# Altium PCB PCB1.PcbDoc
Units mm, origin at the board's own origin, x right, y up, seen from the top; angles counter-clockwise.
Board outline 143.82 x 127.37 mm, 2 copper layers (Top Layer, Bottom Layer), stack 1.671 mm thick; 59 components, 8 nets, 134 pads, 55 vias.
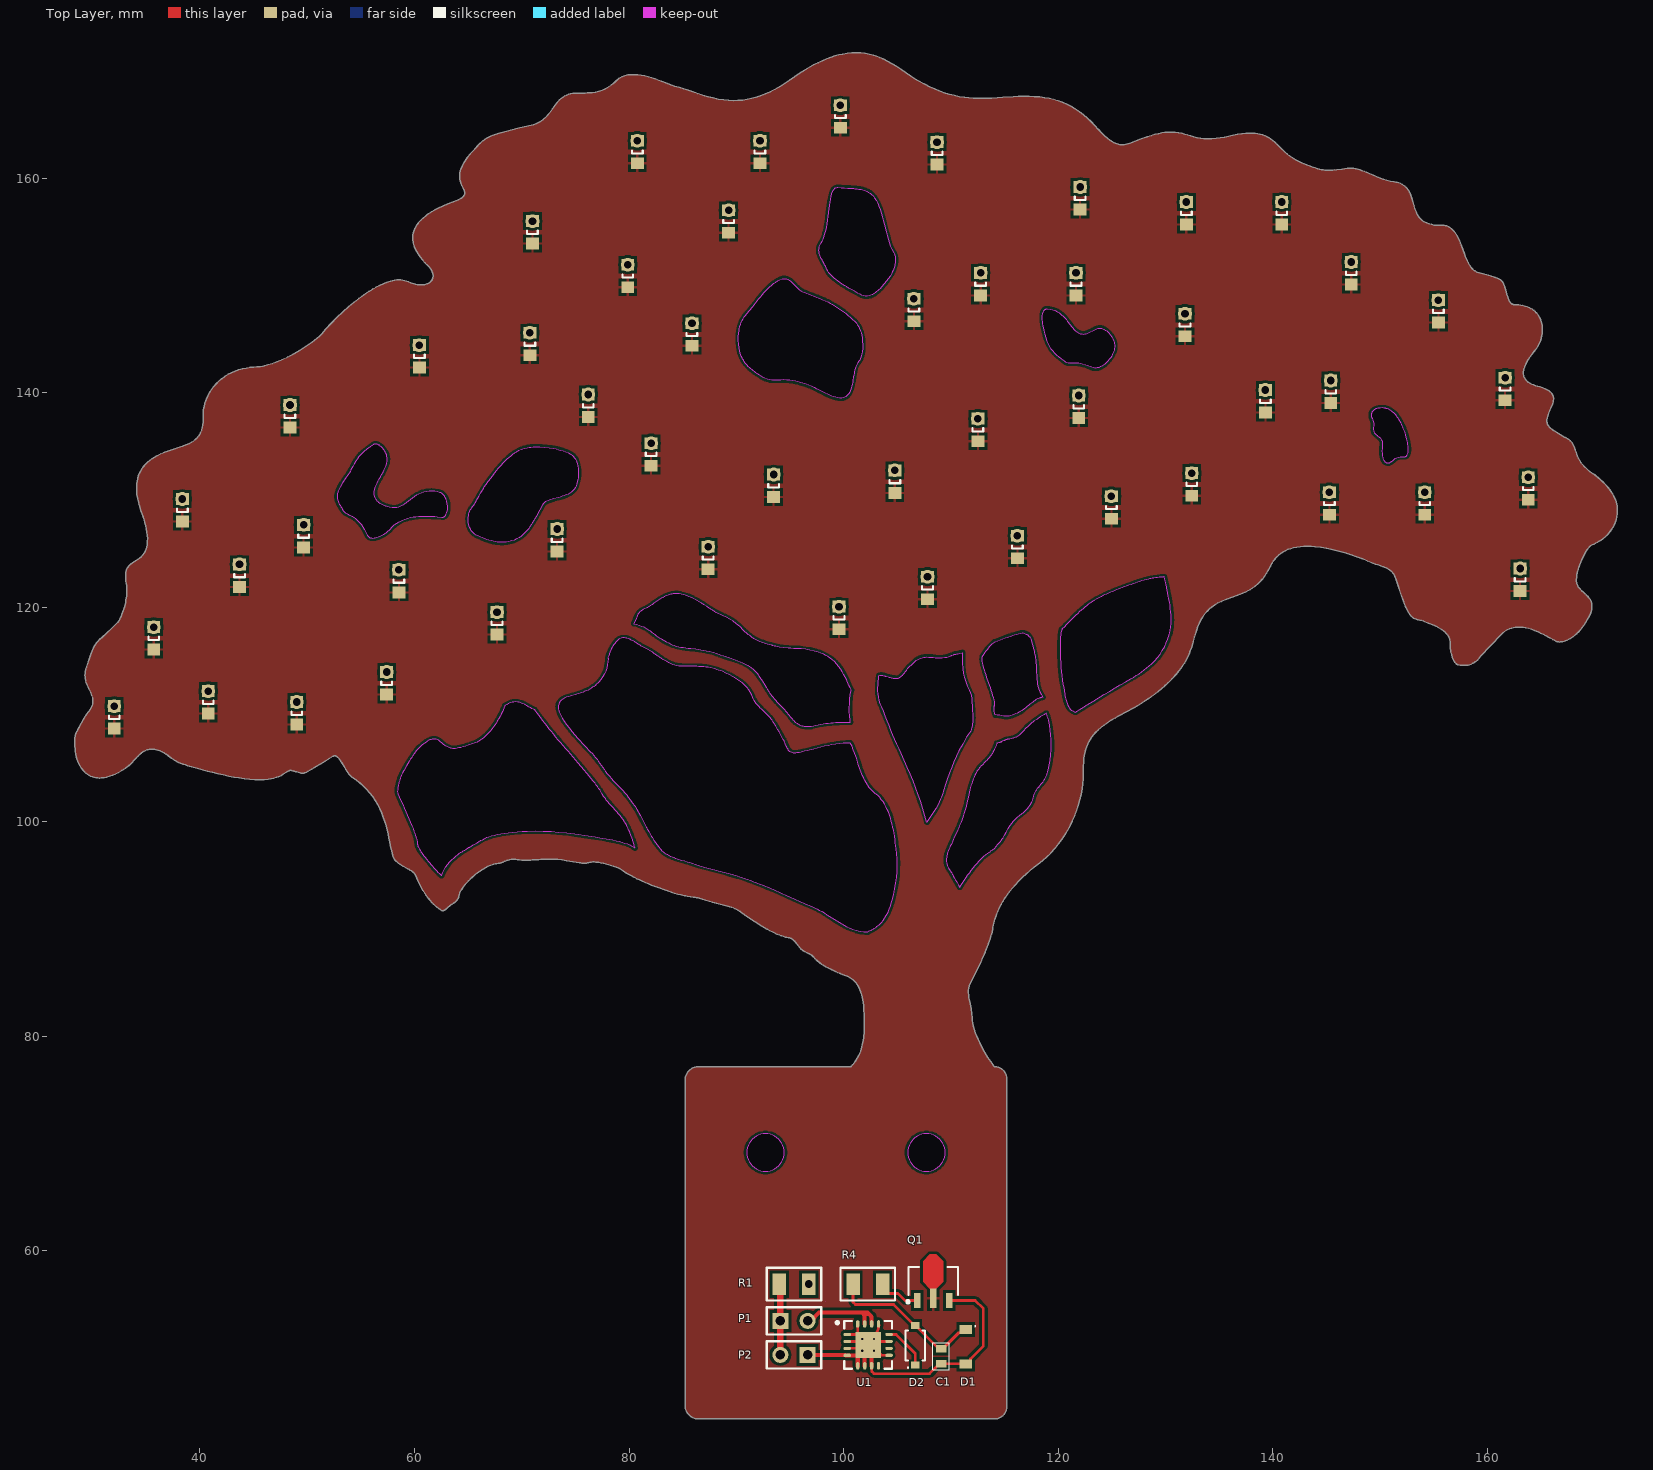
[diagram p0: Top Layer view]
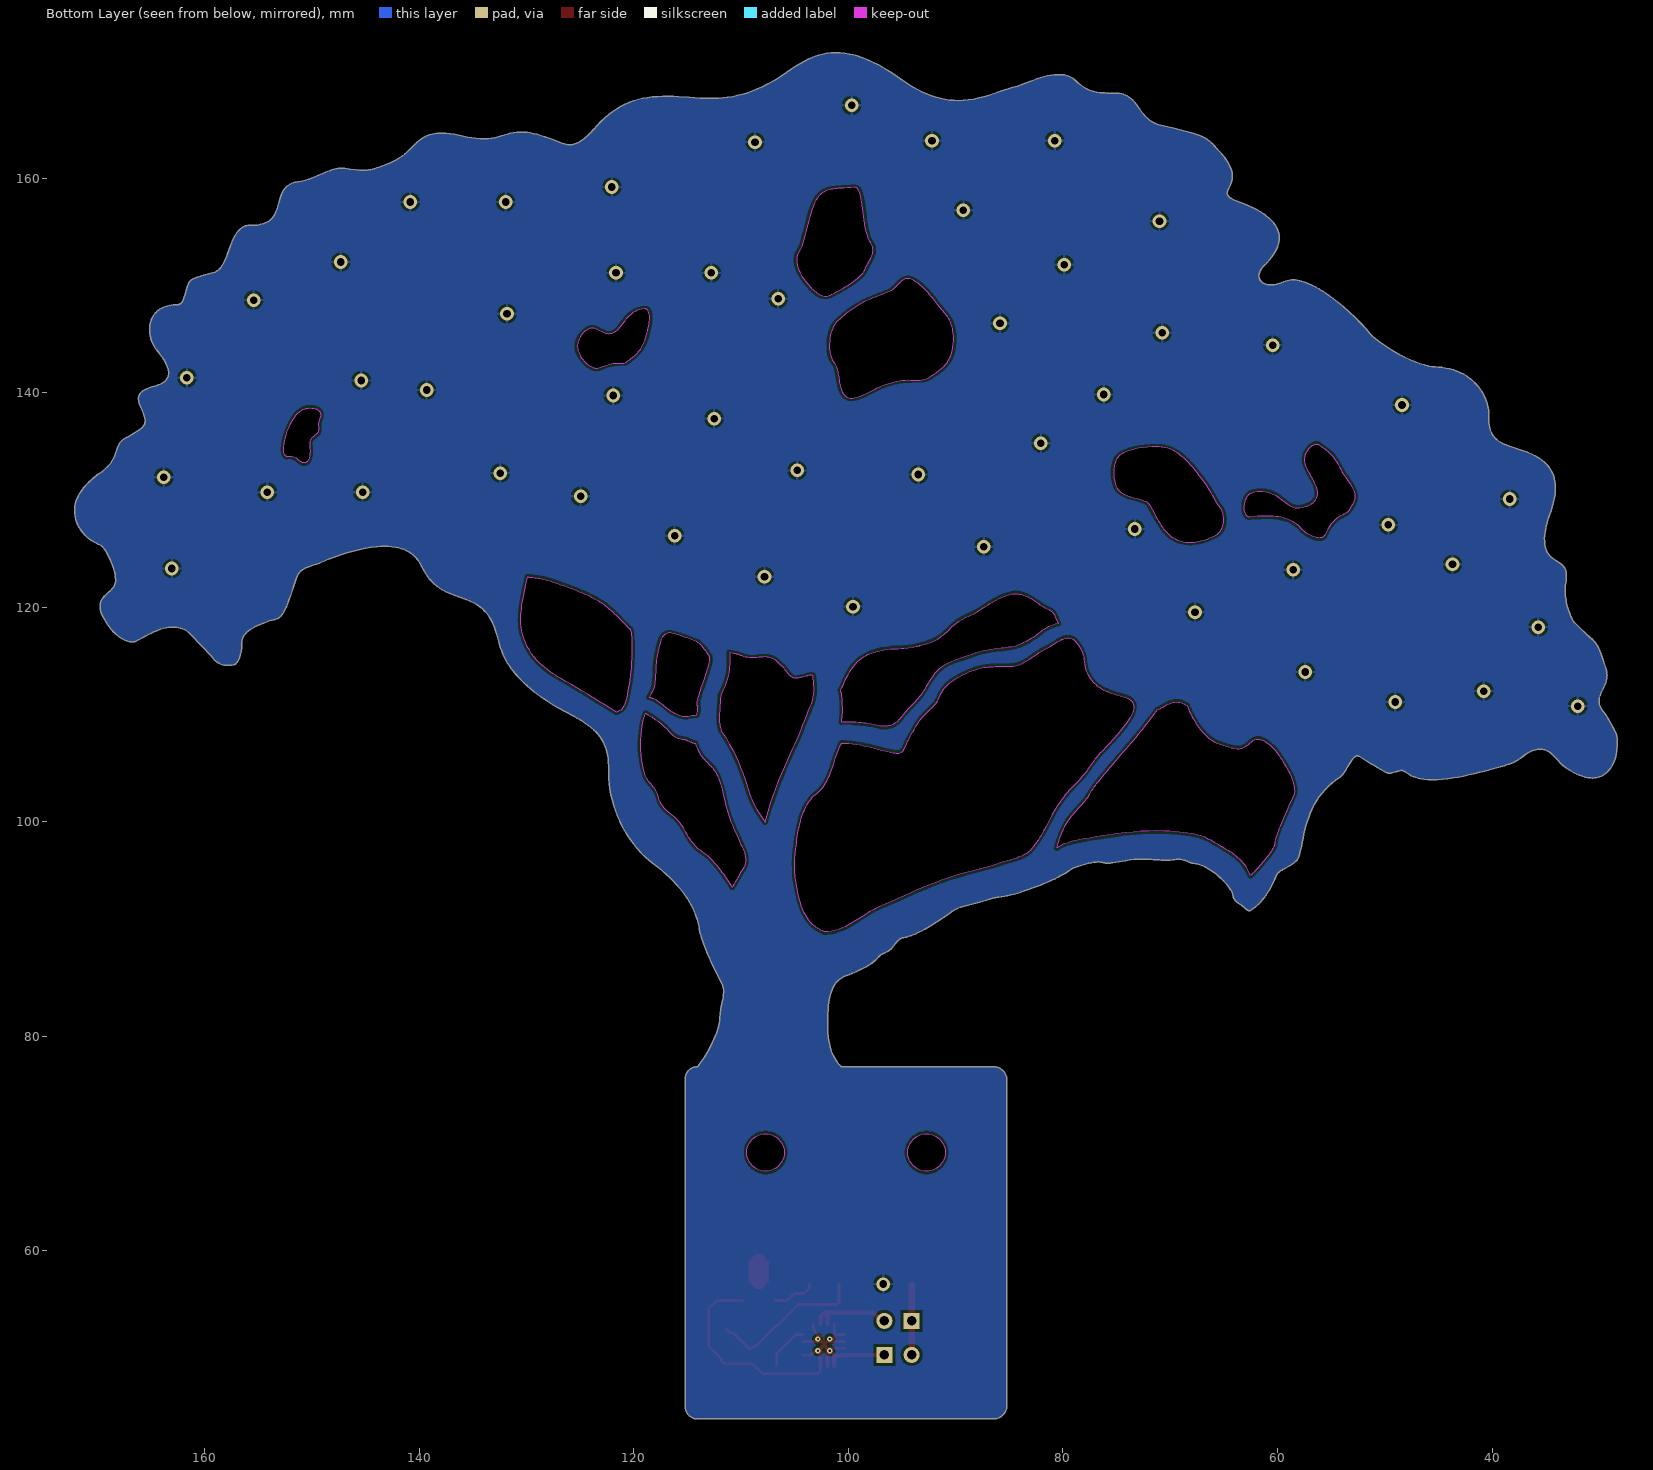
[diagram p1: Bottom Layer view, seen from below]
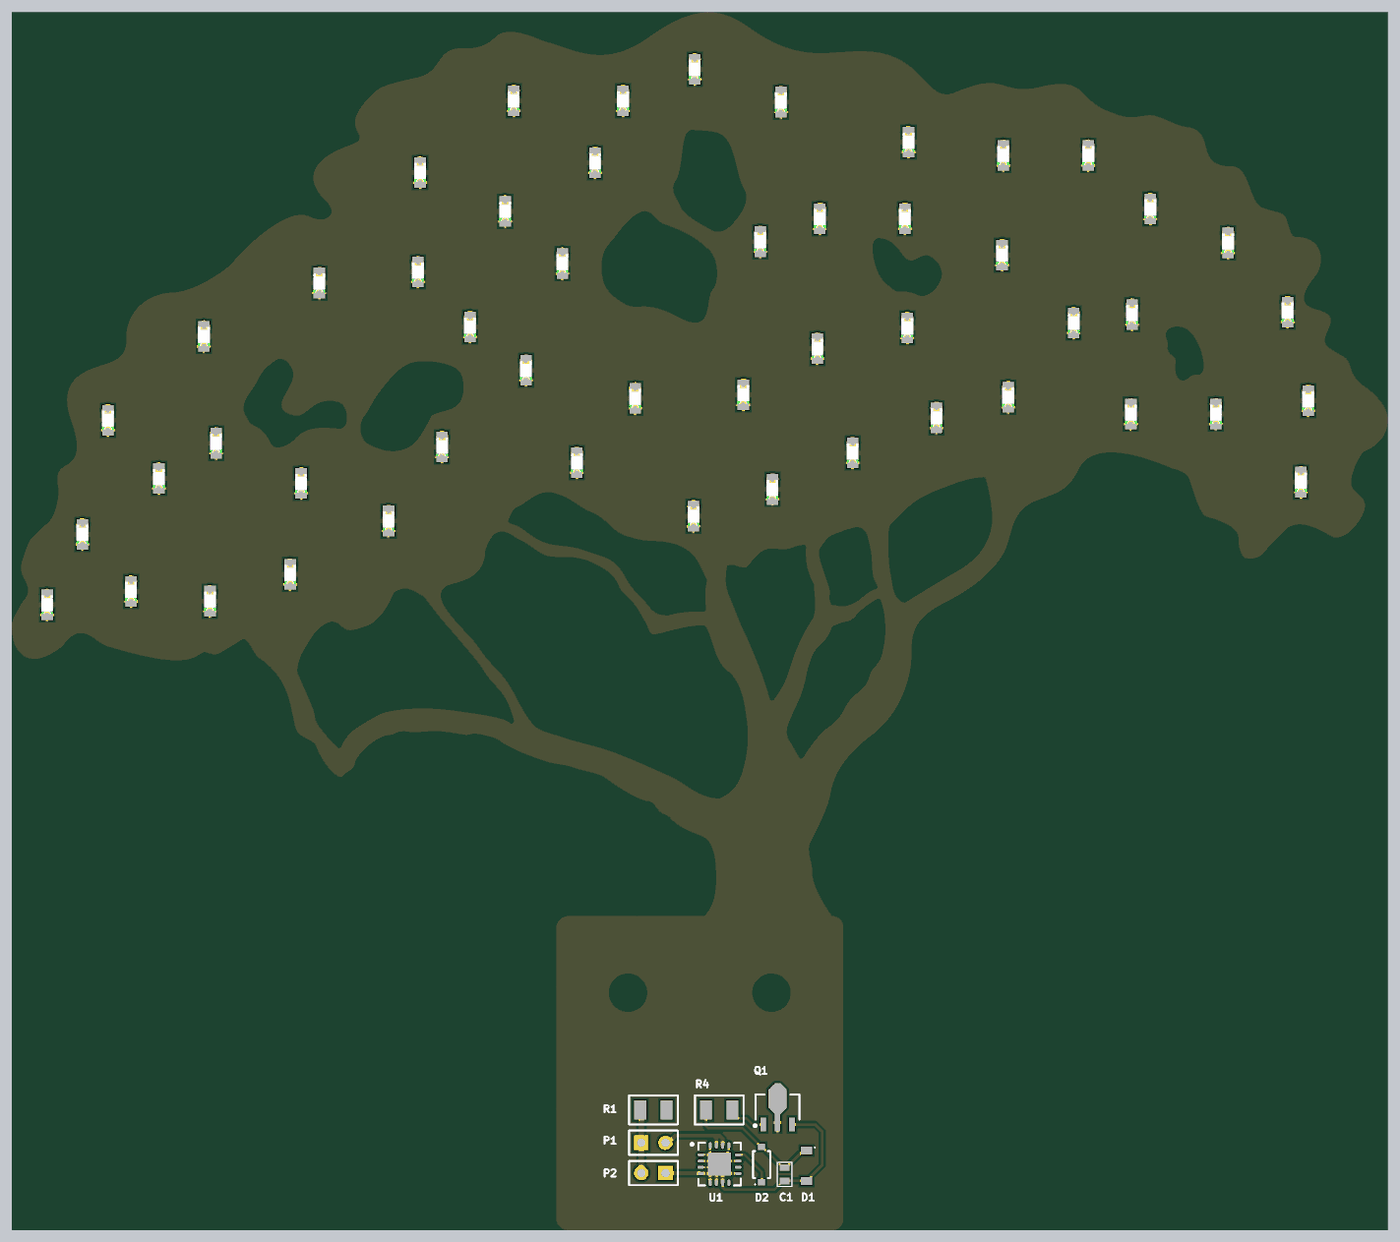
[diagram p2: 3D render of the assembled board from above, using the file's embedded part models]

## Layer stack, top to bottom
Top Solder: solder mask 0.0102, Solder Resist, Dk 3.5
Top Layer: signal copper 0.0356
Dielectric 1: dielectric 1.6, FR-4, Dk 4.8
Bottom Layer: signal copper 0.0356
Bottom Solder: solder mask 0.0102, Solder Resist, Dk 3.5

## Board outline
1067 vertices, not listed, extent 28.311,44.323 172.133,171.689
cut-out: 90.97,69.158 ccw(c92.72,69.158) 92.72,67.408 ccw(c92.72,69.158) 94.47,69.158 ccw(c92.72,69.158) 92.72,70.908 ccw(c92.72,69.158)
cut-out: 105.97,69.158 ccw(c107.72,69.158) 107.72,67.408 ccw(c107.72,69.158) 109.47,69.158 ccw(c107.72,69.158) 107.72,70.908 ccw(c107.72,69.158)
cut-out: 103.899,109.861 103.725,110.297 103.547,110.732 cw(c107.329,112.387) 103.203,112.529 cw(c109.505,112.384) 103.216,112.802 cw(c112.188,112.204) 103.238,113.072 103.266,113.339 103.296,113.606 cw(c103.499,113.224) 103.53,113.655 cw(c103.488,112.719) 103.666,113.639 cw(c103.3,111.734) 103.816,113.604 cw(c102.351,108.266) 103.978,113.557 104.153,113.504 ccw(c105.706,118.689) 104.34,113.451 ccw(c105.171,116.644) 104.539,113.406 ccw(c105.018,115.86) 104.75,113.374 ccw(c104.975,115.467) 104.973,113.362 ccw(c104.966,113.88) 105.25,113.446 ccw(c104.763,114.219) 105.376,113.542 ccw(c104.308,114.725) 105.498,113.665 ccw(c103.163,115.749) 105.618,113.809 ccw(c98.693,119.29) 105.74,113.966 105.866,114.131 cw(c110.422,110.625) 105.998,114.297 cw(c108.509,112.212) 106.14,114.457 cw(c107.757,112.926) 106.295,114.605 ccw(c99.701,121.968) 106.568,114.859 cw(c108.702,112.592) 106.707,114.982 cw(c107.846,113.615) 106.859,115.096 cw(c107.652,113.902) 107.032,115.194 cw(c107.703,113.767) 107.482,115.328 cw(c107.832,112.977) 107.775,115.354 cw(c107.859,111.869) 108.126,115.344 cw(c107.724,110.082) 108.544,115.295 ccw(c108.938,117.851) 109.44,115.314 ccw(c108.818,118.536) 109.762,115.394 ccw(c108.649,119.116) 109.93,115.448 ccw(c108.471,119.625) 110.103,115.513 110.103,115.512 110.234,115.566 cw(c110.779,114.25) 110.279,115.584 cw(c110.545,114.87) 110.323,115.599 cw(c110.612,114.641) 110.375,115.613 cw(c110.921,113.376) 110.444,115.629 110.54,115.648 110.671,115.674 110.849,115.709 111.081,115.754 ccw(c122.106,115.136) 111.064,115.01 ccw(c119.195,115.121) 111.078,114.632 ccw(c118.187,115.061) 111.111,114.25 ccw(c117.419,114.968) 111.251,113.467 ccw(c117.391,114.976) 111.694,112.234 ccw(c118.198,115.347) 111.918,111.803 ccw(c120.457,111.837) 111.947,111.133 111.975,110.797 112.004,110.462 cw(c99.077,109.402) 112.027,110.126 cw(c104.529,109.707) 112.038,109.791 cw(c106.747,109.732) 112.031,109.456 cw(c107.898,109.672) 112,109.12 cw(c108.531,109.588) 111.938,108.785 cw(c108.841,109.516) 111.839,108.449 ccw(c126.124,98.833) 110.758,106.606 ccw(c128.49,97.622) 110.065,105.082 ccw(c131.259,96.501) 109.471,103.438 cw(c98.605,106.333) 109.174,102.492 cw(c100.446,105.68) 109.014,102.085 cw(c101.093,105.414) 108.323,100.771 cw(c97.728,107.523) 108.141,100.494 107.958,100.228 107.775,99.966 ccw(c75.29,91.004) 107.181,101.89 ccw(c68.074,88.57) 106.721,103.172 ccw(c60.372,85.661) 106.216,104.455 ccw(c49.993,81.408) 105.672,105.738 105.389,106.379 cw(c124.974,116.265) 104.973,107.25 104.781,107.685 104.597,108.12 104.418,108.556 104.244,108.991 104.072,109.426
cut-out: 323 vertices, not listed, extent 109.581,93.902 119.368,110.095
cut-out: 114.029,110.478 cw(c114.877,110.529) 114.029,110.584 cw(c114.82,110.53) 114.04,110.672 cw(c114.045,110.671) 114.04,110.672 cw(c115.63,110.376) 114.057,110.751 ccw(c111.791,111.29) 114.074,110.83 cw(c114.08,110.829) 114.074,110.831 ccw(c113.145,111.014) 114.088,110.92 ccw(c112.92,111.022) 114.092,111.022 ccw(c112.92,111.022) 114.083,111.171 ccw(c112.92,111.022) 114.083,111.171 cw(c108.58,110.076) 114.083,111.171 ccw(c108.58,110.076) 113.989,111.567 cw(c113.994,111.569) 113.989,111.567 ccw(c103.208,108.613) 113.859,112.007 cw(c113.864,112.009) 113.858,112.007 ccw(c91.878,105.018) 113.704,112.476 cw(c113.709,112.478) 113.704,112.476 113.537,112.96 cw(c113.542,112.962) 113.537,112.961 113.369,113.446 cw(c113.374,113.448) 113.369,113.446 cw(c136.592,121.404) 113.212,113.918 cw(c124.516,117.545) 113.079,114.363 cw(c118.887,115.987) 112.981,114.767 ccw(c114.736,115.201) 112.981,114.767 cw(c114.736,115.201) 112.938,115.395 cw(c112.944,115.394) 112.939,115.397 113.034,115.537 113.127,115.678 cw(c113.132,115.675) 113.128,115.678 113.223,115.818 cw(c113.227,115.815) 113.223,115.818 cw(c118.873,111.917) 113.322,115.958 cw(c117.35,113.025) 113.427,116.097 cw(c116.251,113.91) 114.124,116.78 cw(c114.127,116.775) 114.126,116.78 114.365,116.866 114.597,116.952 cw(c114.599,116.947) 114.597,116.952 114.826,117.039 cw(c114.828,117.034) 114.826,117.039 114.827,117.039 115.056,117.126 cw(c115.058,117.121) 115.057,117.126 115.291,117.212 cw(c115.293,117.207) 115.291,117.212 cw(c119.941,104.317) 115.533,117.297 cw(c118.837,107.615) 116.652,117.609 cw(c116.653,117.604) 116.653,117.609 cw(c116.645,116.837) 117.049,117.495 cw(c116.645,116.837) 117.05,117.495 cw(c116.615,116.793) 117.129,117.439 cw(c116.535,116.694) 117.202,117.375 cw(c116.395,116.551) 117.269,117.303 cw(c116.169,116.355) 117.332,117.225 cw(c117.328,117.222) 117.332,117.225 cw(c115.546,115.9) 117.447,117.054 cw(c117.442,117.051) 117.447,117.053 cw(c101.786,112.355) 117.716,116.039 cw(c117.711,116.038) 117.716,116.039 cw(c103.613,112.774) 117.784,115.732 cw(c117.779,115.731) 117.784,115.732 cw(c105.867,113.243) 117.845,115.418 cw(c108.319,113.686) 117.897,115.105 cw(c110.713,114.039) 117.935,114.801 cw(c117.93,114.801) 117.935,114.801 cw(c113.84,114.339) 117.961,114.339 cw(c113.84,114.339) 117.96,114.25 117.98,113.926 cw(c117.974,113.926) 117.98,113.926 cw(c117.974,113.926) 117.98,113.926 117.996,113.629 cw(c117.99,113.629) 117.996,113.629 ccw(c132.954,114.441) 118.013,113.356 cw(c118.008,113.355) 118.013,113.355 ccw(c124.801,113.848) 118.013,113.355 ccw(c124.801,113.848) 118.036,113.099 ccw(c124.801,113.848) 118.036,113.098 ccw(c118.031,113.098) 118.036,113.099 118.036,113.098 ccw(c122.287,113.57) 118.036,113.098 ccw(c122.287,113.57) 118.071,112.853 ccw(c122.287,113.57) 118.071,112.853 cw(c118.066,112.852) 118.071,112.853 ccw(c120.998,113.338) 118.286,112.134 cw(c118.281,112.132) 118.286,112.134 cw(c121.775,113.705) 118.286,112.134 ccw(c121.775,113.705) 118.571,111.614 ccw(c121.775,113.705) 118.571,111.614 cw(c118.566,111.611) 118.572,111.611 cw(c118.566,111.611) 118.568,111.606 cw(c117.56,115.765) 118.477,111.585 cw(c118.476,111.59) 118.477,111.585 cw(c118.948,109.447) 118.477,111.585 ccw(c118.948,109.447) 118.386,111.563 ccw(c118.948,109.447) 118.386,111.563 ccw(c118.384,111.568) 118.386,111.563 ccw(c118.712,110.347) 118.284,111.531 cw(c118.283,111.536) 118.284,111.531 cw(c118.771,110.193) 118.284,111.531 ccw(c118.771,110.193) 118.165,111.481 ccw(c118.771,110.193) 118.165,111.481 ccw(c118.163,111.486) 118.165,111.481 ccw(c119.072,109.557) 118.019,111.405 cw(c118.016,111.41) 118.019,111.405 cw(c119.785,108.304) 118.019,111.405 ccw(c119.785,108.304) 117.838,111.295 ccw(c119.785,108.304) 117.838,111.295 ccw(c121.205,106.118) 117.614,111.142 cw(c117.611,111.146) 117.614,111.142 ccw(c123.771,102.518) 117.338,110.938 cw(c117.334,110.942) 117.338,110.938 ccw(c131.166,92.929) 116.597,110.344 cw(c116.593,110.348) 116.596,110.344 cw(c113.667,115.037) 116.212,110.124 cw(c114.548,113.333) 115.88,109.973 cw(c114.969,112.271) 115.592,109.879 cw(c115.147,111.559) 115.118,109.821 cw(c115.118,109.827) 115.118,109.821 cw(c115.159,111.703) 114.915,109.837 cw(c114.916,109.842) 114.915,109.837 cw(c115.86,116.26) 114.539,109.903 cw(c114.54,109.909) 114.539,109.903 ccw(c114.086,107.679) 114.147,109.948 cw(c114.147,109.954) 114.142,109.952 cw(c117.995,111.151) 114.08,110.171 cw(c116.236,110.713) 114.044,110.343 cw(c115.303,110.556)
cut-out: 121.137,110.501 ccw(c121.892,111.203) 121.612,110.21 ccw(c121.614,110.216) 121.616,110.211 122.184,110.56 ccw(c122.181,110.565) 122.184,110.56 122.735,110.9 ccw(c122.732,110.905) 122.735,110.9 123.273,111.232 ccw(c123.27,111.237) 123.273,111.232 123.797,111.556 ccw(c123.794,111.56) 123.797,111.556 124.311,111.871 ccw(c124.308,111.875) 124.311,111.871 124.815,112.177 124.815,112.178 124.815,112.177 125.31,112.476 125.8,112.766 cw(c155.653,62.078) 126.764,113.322 ccw(c120.056,125.263) 127.286,113.631 ccw(c121.603,122.775) 127.793,113.966 ccw(c122.728,121.174) 128.279,114.333 ccw(c123.586,120.117) 128.736,114.736 ccw(c124.813,118.928) 130.506,118.181 ccw(c130.5,118.182) 130.506,118.182 130.506,118.181 ccw(c126.498,118.725) 130.542,118.686 ccw(c130.537,118.686) 130.542,118.686 ccw(c123.321,118.775) 130.543,118.775 ccw(c123.321,118.775) 130.527,119.256 ccw(c119.198,118.513) 130.471,119.863 ccw(c114.495,117.96) 130.385,120.479 ccw(c109.791,117.221) 130.282,121.077 ccw(c104.742,116.264) 130.066,122.105 ccw(c130.061,122.104) 130.066,122.106 130.066,122.105 130.066,122.106 129.977,122.481 ccw(c129.972,122.48) 129.977,122.481 ccw(c129.972,122.48) 129.977,122.481 ccw(c113.657,118.498) 129.892,122.815 ccw(c129.887,122.813) 129.886,122.819 129.862,122.817 ccw(c129.863,122.811) 129.862,122.817 129.796,122.811 cw(c129.797,122.805) 129.796,122.811 129.567,122.788 ccw(c129.568,122.783) 129.567,122.788 129.419,122.772 ccw(c129.42,122.767) 129.419,122.772 129.259,122.754 ccw(c129.26,122.748) 129.259,122.754 cw(c129.26,122.748) 129.259,122.754 129.095,122.733 129.094,122.733 ccw(c129.095,122.728) 129.094,122.733 cw(c129.095,122.728) 129.095,122.733 129.094,122.733 128.933,122.71 cw(c128.933,122.705) 128.933,122.71 ccw(c129.605,118.067) 128.647,122.66 ccw(c128.648,122.655) 128.647,122.66 ccw(c130.848,112.489) 128.438,122.612 ccw(c131.096,111.465) 128.022,122.505 ccw(c131.573,109.752) 127.609,122.383 ccw(c132.286,107.478) 127.201,122.248 ccw(c127.202,122.243) 127.201,122.248 126.998,122.177 ccw(c127,122.172) 126.998,122.177 ccw(c134.14,102.21) 126.595,122.028 126.221,121.887 cw(c126.223,121.882) 126.221,121.887 125.846,121.746 ccw(c125.848,121.74) 125.846,121.745 125.471,121.602 ccw(c125.473,121.597) 125.471,121.602 125.098,121.454 cw(c125.1,121.449) 125.098,121.454 ccw(c132.751,102.511) 124.727,121.3 ccw(c130.899,106.847) 124.361,121.138 ccw(c129.656,109.564) 124,120.966 ccw(c128.745,111.401) 123.646,120.782 ccw(c127.751,113.204) 122.963,120.37 ccw(c122.966,120.366) 122.963,120.37 ccw(c125.859,116.096) 122.654,120.144 ccw(c128.388,112.878) 122.322,119.869 ccw(c131.774,108.961) 121.979,119.562 ccw(c135.707,104.694) 121.638,119.24 ccw(c139.677,100.582) 121.314,118.921 cw(c121.318,118.917) 121.314,118.921 ccw(c143.9,96.372) 120.766,118.359 ccw(c120.77,118.355) 120.766,118.359 120.569,118.15 ccw(c120.573,118.146) 120.569,118.15 120.398,117.964 ccw(c120.4,117.882) 120.319,117.886 ccw(c121.545,117.466) 120.259,117.625 ccw(c121.545,117.466) 120.259,117.625 ccw(c125.689,116.847) 120.215,117.212 ccw(c132.573,116.348) 120.19,116.679 ccw(c120.195,116.679) 120.19,116.679 ccw(c143.277,116.109) 120.226,114.693 ccw(c139.995,115.885) 120.279,114.013 ccw(c130.94,114.944) 120.45,112.823 ccw(c120.456,112.824) 120.45,112.823 cw(c113.957,111.448) 120.505,112.532 ccw(c120.511,112.533) 120.505,112.532 120.555,112.222 ccw(c120.56,112.223) 120.555,112.222 120.606,111.903 120.606,111.902 ccw(c128.551,113.229) 120.666,111.583 ccw(c125.09,112.504) 120.742,111.274 ccw(c123.472,112.045) 120.841,110.984 ccw(c120.846,110.986) 120.841,110.984 ccw(c122.577,111.682) 120.97,110.723 ccw(c122.099,111.396)
cut-out: 149.667,136.066 ccw(c152.815,139.793) 149.808,135.952 cw(c147.899,133.514) 149.948,135.834 cw(c149.184,134.968) 150.075,135.704 cw(c149.508,135.237) 150.173,135.548 cw(c149.475,135.242) 150.227,135.118 ccw(c154.479,134.567) 150.194,134.725 ccw(c154.097,134.578) 150.192,134.508 ccw(c153.354,134.563) 150.204,134.289 ccw(c152.529,134.489) 150.232,134.077 ccw(c151.791,134.355) 150.279,133.882 ccw(c151.236,134.179) 150.35,133.712 ccw(c150.899,134) 150.446,133.576 ccw(c150.75,133.857) 150.729,133.444 ccw(c150.749,133.788) 150.845,133.457 ccw(c150.7,133.944) 150.956,133.505 ccw(c150.42,134.429) 151.066,133.579 ccw(c148.644,136.78) 151.181,133.668 cw(c154.332,129.793) 151.303,133.765 cw(c152.448,132.261) 151.439,133.86 cw(c152.052,132.914) 152.208,134.03 ccw(c152.26,134.372) 152.407,134.059 ccw(c152.255,134.35) 152.541,134.189 ccw(c151.946,134.524) 152.618,134.401 ccw(c151.127,134.689) 152.645,134.675 ccw(c149.785,134.714) 152.632,134.993 ccw(c148.141,134.562) 152.586,135.336 ccw(c146.288,134.234) 152.428,136.018 ccw(c147.716,134.687) 152.236,136.569 ccw(c141.133,131.806) 152.134,136.8 ccw(c144.521,133.345) 152.023,137.035 ccw(c146.372,134.255) 151.902,137.268 ccw(c147.595,134.923) 151.77,137.496 ccw(c148.474,135.465) 151.625,137.714 ccw(c149.119,135.926) 151.467,137.918 ccw(c149.582,136.32) 151.293,138.102 ccw(c149.895,136.646) 151.104,138.262 ccw(c150.139,136.983) 150.673,138.494 ccw(c150.286,137.367) 150.53,138.534 ccw(c150.178,136.8) 150.029,138.563 ccw(c150.166,136.865) 149.859,138.54 ccw(c150.114,137.141) 149.697,138.501 ccw(c150.017,137.456) 149.549,138.444 ccw(c149.887,137.727) 149.422,138.368 ccw(c149.708,137.959) 149.25,138.159 ccw(c149.951,137.862) 149.206,138.016 ccw(c149.77,137.901) 149.194,137.889 ccw(c149.805,137.905) 149.209,137.772 ccw(c150.167,137.988) 149.241,137.66 ccw(c152.485,138.81) 149.284,137.545 cw(c146.031,136.263) 149.33,137.421 cw(c148.031,136.959) 149.4,137.124 cw(c147.875,136.96) 149.39,136.718 ccw(c150.004,136.605) 149.443,136.331 ccw(c150.053,136.646) 149.54,136.189 ccw(c150.471,137.02)
cut-out: 119.499,143.9 cw(c121.569,145.558) 119.178,144.409 cw(c123.61,146.577) 119.092,144.596 cw(c129.29,149.07) 119.005,144.8 cw(c124.294,146.925) 118.796,145.42 cw(c126.579,147.616) 118.614,146.217 cw(c124.393,147.229) 118.558,146.624 cw(c122.319,147.021) 118.537,147.005 cw(c120.575,147.022) 118.561,147.338 cw(c119.466,147.204) 118.641,147.599 cw(c119.006,147.427) 118.786,147.765 cw(c118.968,147.457) 119.005,147.813 cw(c118.894,145.675) 120.308,147.282 cw(c118.281,144.963) 120.606,146.984 cw(c116.314,143.255) 120.867,146.661 121.108,146.336 ccw(c125.745,149.75) 121.347,146.033 ccw(c123.154,147.556) 121.604,145.772 ccw(c122.523,146.832) 121.896,145.577 ccw(c122.411,146.624) 122.241,145.47 ccw(c122.351,146.335) 122.629,145.508 ccw(c122.107,147.169) 122.822,145.582 ccw(c121.36,148.833) 123.014,145.675 123.205,145.776 cw(c125.641,141.225) 123.395,145.873 cw(c124.296,144.014) 123.584,145.953 cw(c123.976,144.889) 123.771,146.004 cw(c123.904,145.28) 123.956,146.015 cw(c123.91,145.405) 124.139,145.972 cw(c123.539,144.522) 124.522,145.745 cw(c123.257,144.159) 124.853,145.412 cw(c123.249,144.136) 125.191,144.79 cw(c123.622,144.272) 125.247,144.568 cw(c123.866,144.316) 125.27,144.347 cw(c124.081,144.321) 125.255,144.13 cw(c123.272,144.494) 125.058,143.559 cw(c122.537,144.839) 124.891,143.273 cw(c122.45,144.889) 124.456,142.757 cw(c122.845,144.474) 124.203,142.551 cw(c123.168,144.012) 123.938,142.395 cw(c123.384,143.555) 123.666,142.301 cw(c123.46,143.217) 123.395,142.28 cw(c123.453,143.076) 123.134,142.345 ccw(c120.827,137.191) 122.264,142.652 ccw(c121.409,139.296) 121.935,142.719 ccw(c121.499,139.854) 121.436,142.751 ccw(c121.634,133.826) 121.244,142.745 cw(c121.125,145.31) 121.077,142.742 cw(c121.094,143.651) 120.924,142.758 cw(c121.075,143.481) 120.617,142.902 cw(c127.468,152.147) 120.044,143.355 cw(c123.857,147.837) 119.826,143.55 cw(c122.585,146.485) 119.647,143.73 cw(c121.845,145.79)
cut-out: 98.057,152.253 cw(c105.253,156.227) 97.932,152.488 cw(c105.253,156.227) 97.932,152.488 cw(c97.927,152.486) 97.932,152.488 cw(c100.86,153.985) 97.824,152.721 ccw(c97.819,152.719) 97.824,152.721 ccw(c99.577,153.452) 97.824,152.721 cw(c99.577,153.452) 97.744,152.954 ccw(c97.739,152.953) 97.744,152.954 ccw(c98.878,153.274) 97.744,152.954 cw(c98.878,153.274) 97.71,153.433 cw(c98.878,153.274) 97.71,153.433 cw(c98.878,153.274) 97.71,153.433 cw(c98.97,153.231) 97.915,153.949 cw(c98.97,153.231) 97.916,153.949 97.915,153.949 ccw(c97.911,153.952) 97.916,153.949 ccw(c95.744,155.322) 98.161,154.451 ccw(c93.449,156.171) 98.34,155.056 ccw(c88.928,157.223) 98.47,155.728 ccw(c77.729,158.997) 98.568,156.429 ccw(c98.563,156.43) 98.568,156.429 98.653,157.121 ccw(c98.647,157.122) 98.653,157.121 ccw(c98.647,157.122) 98.653,157.122 98.653,157.121 cw(c118.748,154.711) 98.741,157.767 ccw(c98.735,157.768) 98.741,157.767 cw(c105.381,156.77) 98.85,158.329 ccw(c98.844,158.331) 98.85,158.33 cw(c101.205,157.786) 98.997,158.77 cw(c101.205,157.786) 98.997,158.77 ccw(c98.992,158.772) 98.997,158.771 cw(c99.479,158.636) 99.473,159.136 cw(c99.479,158.636) 99.474,159.136 99.473,159.136 99.782,159.114 ccw(c99.783,159.119) 99.782,159.114 100.084,159.094 ccw(c100.085,159.099) 100.084,159.094 cw(c100.085,159.099) 100.084,159.094 100.377,159.075 100.658,159.055 ccw(c100.658,159.06) 100.658,159.055 100.925,159.034 ccw(c100.925,159.039) 100.925,159.034 cw(c99.857,146.739) 101.176,159.009 ccw(c101.177,159.014) 101.176,159.009 cw(c100.338,151.199) 101.41,158.98 ccw(c101.411,158.986) 101.41,158.98 ccw(c100.72,153.96) 101.41,158.98 cw(c100.72,153.96) 101.624,158.946 ccw(c101.625,158.952) 101.624,158.946 cw(c101.191,156.435) 101.983,158.857 ccw(c101.985,158.862) 101.983,158.857 cw(c101.447,157.284) 102.472,158.592 cw(c101.447,157.284) 102.472,158.592 ccw(c102.475,158.596) 102.472,158.592 ccw(c101.196,156.982) 102.472,158.592 cw(c102.475,158.596) 102.472,158.592 cw(c101.196,156.982) 102.86,158.187 ccw(c102.865,158.19) 102.86,158.187 cw(c100.255,156.3) 103.167,157.667 ccw(c103.172,157.67) 103.167,157.667 ccw(c98.106,155.28) 103.167,157.667 cw(c98.106,155.28) 103.411,157.06 ccw(c103.416,157.062) 103.411,157.06 cw(c93.277,153.644) 103.612,156.391 ccw(c103.617,156.393) 103.612,156.391 cw(c76.139,149.068) 103.79,155.688 ccw(c103.795,155.689) 103.79,155.688 103.964,154.977 103.964,154.976 ccw(c119.242,158.783) 104.154,154.283 ccw(c109.612,155.812) 104.659,153.056 ccw(c104.663,153.059) 104.659,153.056 cw(c103.628,152.451) 104.768,152.809 ccw(c104.773,152.81) 104.768,152.809 cw(c103.479,152.406) 104.823,152.544 ccw(c104.828,152.545) 104.823,152.544 cw(c103.171,152.375) 104.831,152.375 cw(c103.171,152.375) 104.828,152.267 cw(c103.171,152.375) 104.828,152.267 ccw(c104.833,152.266) 104.828,152.266 ccw(c102.718,152.404) 104.828,152.267 cw(c104.833,152.266) 104.828,152.267 104.828,152.266 cw(c102.718,152.404) 104.79,151.981 cw(c102.718,152.404) 104.79,151.981 cw(c104.795,151.98) 104.79,151.981 cw(c102.158,152.517) 104.714,151.693 cw(c102.158,152.517) 104.714,151.693 cw(c104.719,151.691) 104.714,151.693 ccw(c104.719,151.691) 104.714,151.693 ccw(c101.55,152.711) 104.714,151.693 cw(c101.55,152.711) 104.607,151.407 ccw(c104.612,151.405) 104.607,151.407 ccw(c100.976,152.954) 104.607,151.407 cw(c100.976,152.954) 104.476,151.128 cw(c100.382,153.27) 103.99,150.384 cw(c100.382,153.27) 103.989,150.384 cw(c103.994,150.38) 103.99,150.384 103.989,150.384 103.811,150.161 ccw(c103.815,150.158) 103.81,150.161 cw(c95.956,156.523) 103.616,149.928 ccw(c103.62,149.925) 103.616,149.928 cw(c99.143,153.778) 103.407,149.698 cw(c99.143,153.778) 103.407,149.697 cw(c103.41,149.694) 103.407,149.698 103.407,149.697 cw(c100.557,152.422) 103.182,149.481 ccw(c103.186,149.477) 103.182,149.481 ccw(c101.366,151.513) 103.182,149.481 cw(c101.366,151.513) 102.944,149.291 cw(c101.366,151.513) 102.944,149.291 cw(c102.947,149.286) 102.944,149.291 cw(c101.834,150.852) 102.692,149.139 ccw(c102.694,149.134) 102.691,149.139 ccw(c102.141,150.161) 102.691,149.139 cw(c102.141,150.161) 101.552,149.16 ccw(c101.549,149.156) 101.552,149.16 ccw(c101.549,149.156) 101.551,149.161 101.322,149.285 ccw(c101.319,149.28) 101.322,149.285 101.021,149.447 100.669,149.641 ccw(c100.666,149.636) 100.668,149.641 100.669,149.641 100.668,149.641 cw(c109.421,165.185) 100.285,149.864 ccw(c100.282,149.859) 100.285,149.864 cw(c107.093,161.286) 99.889,150.109 ccw(c99.886,150.104) 99.889,150.109 cw(c105.106,158.211) 99.502,150.372 ccw(c99.499,150.368) 99.502,150.372 cw(c103.33,155.735) 99.502,150.372 cw(c103.33,155.735) 99.142,150.648 ccw(c99.139,150.644) 99.142,150.648 ccw(c101.786,153.868) 99.142,150.648 cw(c101.786,153.868) 98.83,150.931 ccw(c98.826,150.928) 98.83,150.932 ccw(c100.028,152.201) 98.83,150.932 cw(c100.028,152.201) 98.429,151.501 cw(c100.028,152.201) 98.429,151.502 98.429,151.501 ccw(c95.237,150.275) 98.316,151.762 ccw(c92.845,149.12) 98.189,152.012 ccw(c98.184,152.009) 98.189,152.012
cut-out: 90.841,142.759 cw(c93.153,144.53) 90.676,142.997 cw(c92.836,144.333) 90.539,143.25 cw(c92.601,144.222) 90.433,143.516 cw(c95.178,145.03) 90.225,145.554 cw(c94.334,145.099) 90.291,145.963 cw(c93.819,145.21) 90.399,146.356 cw(c93.34,145.371) 90.55,146.726 cw(c92.953,145.559) 90.747,147.065 cw(c92.692,145.736) 90.991,147.367 ccw(c84.967,152.982) 91.525,148.001 91.81,148.371 92.108,148.757 cw(c104.183,139.298) 92.422,149.144 cw(c99.602,143.135) 92.754,149.519 cw(c97.412,145.18) 93.104,149.867 cw(c96.162,146.543) 93.474,150.173 cw(c95.443,147.516) 93.867,150.424 cw(c95.081,148.185) 94.284,150.603 cw(c94.483,150) 94.714,150.592 cw(c94.352,149.639) 94.915,150.489 cw(c93.905,148.958) 95.11,150.341 cw(c92.587,147.433) 95.301,150.163 cw(c84.305,139.089) 95.493,149.969 ccw(c102.524,156.807) 95.687,149.775 ccw(c98.123,152.278) 95.887,149.595 ccw(c97.089,151.033) 96.095,149.444 ccw(c96.707,150.422) 96.314,149.338 cw(c85.659,118.96) 97.52,148.887 cw(c91.392,133.543) 98.038,148.67 cw(c93.198,137.657) 98.513,148.449 cw(c94.226,139.749) 98.956,148.216 cw(c94.61,140.459) 100.19,147.382 cw(c92.658,137.98) 100.604,147.035 cw(c89.884,134.82) 101.036,146.641 cw(c99.64,145.228) 101.48,145.978 cw(c98.535,144.716) 101.624,145.566 cw(c97.726,144.489) 101.72,145.125 cw(c97.224,144.399) 101.741,143.819 cw(c98.756,144.217) 101.667,143.449 cw(c99.894,143.911) 101.559,143.145 cw(c100.728,143.519) 101.417,142.922 ccw(c102.553,141.944) 101.132,142.424 ccw(c103.949,141.412) 101.042,142.122 ccw(c106.3,140.832) 100.973,141.799 ccw(c114.208,139.391) 100.916,141.462 100.861,141.12 cw(c92.108,142.541) 100.8,140.783 cw(c96.456,141.659) 100.722,140.46 cw(c98.155,141.179) 100.618,140.159 cw(c98.995,140.83) 100.478,139.889 cw(c99.784,140.308) 99.967,139.518 cw(c99.723,140.612) 99.643,139.494 cw(c99.777,141.427) 99.285,139.553 cw(c100.159,142.918) 98.904,139.676 cw(c101.177,145.573) 98.509,139.844 cw(c103.984,151.626) 98.109,140.038 97.713,140.24 ccw(c89.376,124.047) 97.331,140.431 ccw(c94.554,134.728) 96.973,140.592 ccw(c93.569,132.459) 95.535,141.054 ccw(c94.32,135.538) 94.985,141.147 ccw(c94.369,135.741) 94.125,141.176 cw(c93.478,151.733) 93.451,141.156 cw(c93.505,143.323) 93.134,141.188 cw(c93.519,143.235) 92.442,141.452 cw(c96.631,148.721) 91.943,141.763 cw(c95.628,147.217) 91.698,141.937 cw(c95.034,146.419) 91.462,142.123 cw(c94.488,145.763) 91.237,142.322 cw(c93.988,145.235) 91.029,142.534 cw(c93.541,144.827)
cut-out: 327 vertices, not listed, extent 80.455,108.875 100.717,121.256
cut-out: 65.066,127.69 cw(c67.345,128.197) 65.04,128.563 cw(c67.05,128.251) 65.095,128.813 cw(c66.108,128.555) 65.266,129.175 ccw(c61.91,131.923) 65.436,129.397 ccw(c60.772,132.739) 65.596,129.632 ccw(c58.609,134.132) 65.748,129.877 ccw(c53.541,137.153) 65.896,130.132 66.043,130.394 66.193,130.66 66.349,130.93 cw(c76.086,125.205) 66.514,131.202 cw(c72.894,127.224) 66.884,131.742 cw(c92.801,112.179) 67.402,132.41 cw(c84.126,119.095) 67.867,132.973 cw(c78.563,123.848) 68.286,133.443 cw(c75.096,127.089) 68.665,133.827 cw(c73.019,129.267) 69.013,134.135 cw(c71.849,130.689) 69.335,134.377 cw(c71.116,131.788) 69.932,134.698 cw(c71.112,131.722) 70.512,134.867 cw(c71.226,131.196) 70.853,134.917 cw(c71.402,129.502) 71.239,134.942 cw(c71.437,126.734) 72.998,134.795 cw(c71.606,127.552) 73.438,134.696 cw(c71.927,128.794) 73.857,134.573 cw(c72.632,130.797) 74.585,134.253 cw(c74.078,133.39) 74.815,134.068 cw(c73.849,133.182) 74.995,133.817 cw(c73.395,132.928) 75.129,133.516 cw(c72.764,132.71) 75.218,133.178 cw(c71.659,132.528) 75.248,132.074 cw(c71.743,132.5) 75.188,131.723 cw(c72.847,132.221) 74.976,131.128 cw(c73.948,131.685) 74.763,130.847 cw(c73.668,131.978) 74.478,130.628 cw(c73.187,132.775) 74.14,130.458 cw(c72.449,134.556) 73.768,130.324 cw(c70.765,139.935) 73.382,130.212 73,130.108 ccw(c74.765,123.655) 72.643,129.999 ccw(c73.484,127.464) 72.329,129.872 ccw(c72.677,129.04) 71.907,129.51 71.674,129.07 71.446,128.643 cw(c53.813,138.173) 71.218,128.234 cw(c61.061,134.032) 70.988,127.847 cw(c64.449,131.919) 70.749,127.487 cw(c66.327,130.596) 70.499,127.159 cw(c67.43,129.687) 70.234,126.867 cw(c68.066,129.047) 69.948,126.616 cw(c68.478,128.499) 69.301,126.257 cw(c68.121,129.464) 68.55,126.074 cw(c68.133,129.48) 67.914,126.055 cw(c68.159,129.965) 67.551,126.095 cw(c68.246,130.516) 67.156,126.175 cw(c68.436,131.272) 66.729,126.302 cw(c69.016,132.879) 65.768,126.72 cw(c66.353,127.845) 65.302,127.135 cw(c66.54,127.975) 65.159,127.401 cw(c66.825,128.093)
cut-out: 53.751,128.695 53.965,128.584 cw(c52.071,124.915) 54.201,128.452 cw(c52.751,126.057) 54.456,128.277 cw(c52.745,126.057) 54.728,128.039 cw(c52.32,125.638) 55.013,127.714 cw(c51.354,124.896) 55.309,127.281 cw(c49.603,123.838) 55.612,126.72 ccw(c56.025,126.913) 55.909,126.472 ccw(c56.105,127.186) 56.12,126.445 ccw(c56.1,127.684) 56.358,126.472 ccw(c55.962,128.356) 56.612,126.544 ccw(c55.724,129.031) 56.871,126.653 ccw(c55.542,129.427) 57.566,127.11 ccw(c56.347,128.49) 57.733,127.278 cw(c60.191,125.141) 59.097,128.209 cw(c60.529,124.296) 59.609,128.36 cw(c60.735,123.389) 60.13,128.45 cw(c60.891,122.1) 60.652,128.491 cw(c60.961,120.256) 61.164,128.494 cw(c60.889,117.28) 61.654,128.471 cw(c60.416,110.397) 62.114,128.434 62.532,128.394 ccw(c62.573,128.794) 62.913,128.578 ccw(c62.233,129.047) 63.023,128.806 ccw(c61.661,129.23) 63.081,129.094 ccw(c61.096,129.292) 63.087,129.415 ccw(c60.979,129.297) 62.947,130.063 ccw(c61.589,129.53) 62.801,130.341 ccw(c61.995,129.805) 62.607,130.555 ccw(c62.177,130.026) 62.364,130.682 ccw(c61.533,127.94) 61.107,130.773 ccw(c61.566,128.176) 60.165,130.41 ccw(c62.729,126.229) 59.772,130.142 ccw(c71.791,114.252) 59.408,129.86 cw(c54.836,135.609) 59.056,129.597 cw(c57.566,131.713) 58.701,129.387 cw(c58.055,130.713) 58.326,129.263 cw(c58.106,130.496) 57.914,129.259 cw(c58.426,132.678) 57.352,129.391 cw(c58.228,132.047) 57.166,129.46 cw(c58.066,131.655) 56.987,129.542 cw(c57.88,131.292) 56.82,129.639 56.819,129.639 cw(c57.685,130.989) 56.667,129.75 cw(c57.501,130.765) 56.533,129.876 cw(c57.346,130.623) 56.422,130.019 cw(c57.244,130.555) 56.337,130.179 cw(c57.524,130.649) 56.287,130.963 cw(c58.667,130.413) 56.417,131.364 cw(c60.855,129.497) 56.61,131.769 cw(c69.731,124.765) 56.836,132.177 ccw(c39.72,142.012) 57.064,132.585 ccw(c52.271,135.196) 57.265,132.993 ccw(c54.777,134.095) 57.408,133.399 ccw(c55.841,133.815) 57.462,133.801 ccw(c56.239,133.806) 57.398,134.197 ccw(c55.838,133.645) 57.248,134.51 ccw(c55.497,133.464) 56.886,134.958 ccw(c55.982,133.97) 56.744,135.071 ccw(c56.219,134.317) 56.597,135.154 ccw(c56.349,134.606) 56.45,135.2 ccw(c56.379,134.783) 56.306,135.199 ccw(c56.376,134.82) 56.17,135.146 ccw(c59.892,129.055) 55.272,134.496 ccw(c57.992,131.347) 54.966,134.203 ccw(c57.673,131.683) 54.383,133.373 54.235,133.09 cw(c42.856,138.917) 54.078,132.793 cw(c48.53,135.829) 53.893,132.476 cw(c49.178,135.432) 53.659,132.133 ccw(c59.646,127.608) 53.066,131.216 ccw(c55.861,129.719) 52.902,130.858 ccw(c54.662,130.179) 52.812,130.551 ccw(c54.082,130.298) 52.787,130.284 ccw(c54.027,130.312) 52.889,129.819 ccw(c55.144,130.768) 52.996,129.598 ccw(c59.884,133.344) 53.126,129.368 cw(c41.403,122.491) 53.268,129.119 ccw(c54.043,129.552) 53.561,128.807 ccw(c54.708,130.533)
cut-out: 454 vertices, not listed, extent 58.411,94.988 80.553,111.163
cut-out: 573 vertices, not listed, extent 73.403,89.722 105.002,117.134
cut-out: 98.298,55.245

## Design rules (kind name [scope] priority, off if disabled: settings)
Clearance [All] p1: gap=0.254 ignorepadtopadclearanceinfootprint=FALSE except(0: Arc-Hole Track-Hole SMDPad-Hole THPad-Hole Via-Hole Fill-Hole Poly-Hole Region-Hole Text-Hole)
PolygonConnect [All] p1: connectstyle=Relief reliefconductorwidth=0.254 reliefentries=4 polygonreliefangle="90 Angle" airgapwidth=0.254
RoutingVias [All] p1: holewidth=0.711 width=1.27 viastyle="Through Hole" minholewidth=0.711 minwidth=1.27 maxholewidth=0.711 maxwidth=1.27
SolderMaskExpansion [All] p1: expansion=0.102 istentingtop=FALSE
Width [All] p1: maxlimit=1 minlimit=0.254 preferedwidth=0.6
30 further rules are at their usual default settings.

## Classes and differential pairs
component class Sheet1: C1 D1 D2 LED1 LED2 LED3 LED4 LED5 LED6 LED7 LED8 LED9 LED10 LED11 LED12 LED13 LED14 LED15 LED16 LED17 LED18 LED26 LED27 LED28 LED29 LED30 LED31 LED32 LED33 LED35 LED36 LED37 LED38 LED39 LED40 LED41 LED42 LED43 LED45 LED46 LED47 LED48 LED49 LED50 P1 P2 Q1 R1 R4 U1

## Components (designator, comment, footprint, x,y, rotation, side; value= is the part's Value field where it differs from the comment)
C1 "Cap" "Capacitor 0603" 109.093,50.165 r90 top value=4.7μF
D1 "RB168M-40TR" SODFL350X90-2N 111.379,51.054 r270 top
D2 "MMSZ4678T1G" SODFL371X135-2N 106.68,51.181 r90 top
LED1 "" 0805_A 32.004,109.728 r90 top
LED2 "" 0805_A 35.687,117.094 r90 top
LED3 "" 0805_A 38.354,129.032 r90 top
LED4 "" 0805_A 43.688,122.936 r90 top
LED5 "" 0805_A 49.657,126.619 r90 top
LED6 "" 0805_A 40.767,111.125 r90 top
LED7 "" 0805_A 92.202,162.433 r90 top
LED8 "" 0805_A 48.387,137.795 r90 top
LED9 "" 0805_A 49.022,110.109 r90 top
LED10 "" 0805_A 58.547,122.428 r90 top
LED11 "" 0805_A 57.404,112.903 r90 top
LED12 "" 0805_A 60.452,143.383 r90 top
LED13 "" 0805_A 67.691,118.491 r90 top
LED14 "" 0805_A 70.993,154.94 r90 top
LED15 "" 0805_A 80.772,162.433 r90 top
LED16 "" 0805_A 89.281,155.956 r90 top
LED17 "" 0805_A 76.2,138.777 r90 top
LED18 "" 0805_A 82.053,134.239 r90 top
LED19 "" 0805_A 93.472,131.318 r90 top
LED20 "" 0805_A 70.75,144.526 r90 top
LED21 "" 0805_A 79.883,150.876 r90 top
LED22 "" 0805_A 85.863,145.415 r90 top
LED23 "" 0805_A 73.29,126.238 r90 top
LED24 "" 0805_A 87.376,124.587 r90 top
LED25 "" 0805_A 99.568,118.999 r90 top
LED26 "" 0805_A 99.695,165.735 r90 top
LED27 "" 0805_A 108.712,162.306 r90 top
LED28 "" 0805_A 122.047,158.115 r90 top
LED29 "" 0805_A 104.775,131.699 r90 top
LED30 "" 0805_A 112.522,136.525 r90 top
LED31 "" 0805_A 121.92,138.684 r90 top
LED32 "" 0805_A 106.553,147.701 r90 top
LED33 "" 0805_A 112.776,150.114 r90 top
LED34 "" 0805_A 121.666,150.114 r90 top
LED35 "" 0805_A 107.823,121.793 r90 top
LED36 "" 0805_A 116.205,125.603 r90 top
LED37 "" 0805_A 124.968,129.286 r90 top
LED38 "" 0805_A 139.319,139.192 r90 top
LED39 "" 0805_A 131.953,156.718 r90 top
LED40 "" 0805_A 140.843,156.718 r90 top
LED41 "" 0805_A 145.415,140.081 r90 top
LED42 "" 0805_A 155.448,147.574 r90 top
LED43 "" 0805_A 161.671,140.335 r90 top
LED44 "" 0805_A 163.83,131.064 r90 top
LED45 "" 0805_A 132.461,131.445 r90 top
LED46 "" 0805_A 131.826,146.304 r90 top
LED47 "" 0805_A 147.32,151.13 r90 top
LED48 "" 0805_A 145.288,129.667 r90 top
LED49 "" 0805_A 154.178,129.667 r90 top
LED50 "" 0805_A 163.068,122.555 r90 top
P1 "Switch header" HDR1X2 94.107,53.467 r0 top
P2 "Battery Header" HDR1X2 96.647,50.292 r180 top
Q1 "2SC5785(TE12L,F)" SOT89-150P410X160-3N 108.355,57.172 r90 top
R1 "Res1" "Resistor 1206" 95.377,56.896 r180 top value=1R
R4 "" "Resistor 1206" 102.257,56.896 r0 top value=3.8K
U1 "ADXL335BCPZ" ADI-CP-16-14_L 102.291,51.226 r0 top

## Footprints (in the part's own frame and the unit in brackets; to place one, negate y for a bottom-side part, rotate by r counter-clockwise, add the part's x,y. Pads: shape width x height; smd on the part's side, far side on the other; paste and mask are expansions set on the pad)
0805_A [mm] "Chip LED, 2-Leads, Body 2.0x1.3mm, IPC Medium Density"
  rect 1.1x1.2 smd: 1(-1.05,0) 2(1.05,0)
  silkscreen extent -0.15,-0.5 0.15,0.5, body extent -1,-0.62 1,0.63, height 0.68
ADI-CP-16-14_L [mm] "QFN, 16-Leads, Body 4x4mm, Pitch 0.65mm, Thermal Pad 2.4x2.4mm, IPC High Density"
  oval 0.7x0.3 smd: 1(-1.95,0.975) 2(-1.95,0.325) 3(-1.95,-0.325) 4(-1.95,-0.975) 9(1.95,-0.975) 10(1.95,-0.325) 11(1.95,0.325) 12(1.95,0.975)
  oval 0.3x0.7 smd: 5(-0.975,-1.95) 6(-0.325,-1.95) 7(0.325,-1.95) 8(0.975,-1.95) 13(0.975,1.95) 14(0.325,1.95) 15(-0.325,1.95) 16(-0.975,1.95)
  rect 2.4x2.4 smd: 17(0,0)
  silkscreen extent -3,-2.22 2.22,2.23, body extent -2.08,-2.07 2.07,2.08, height 1.5
"Capacitor 0603" [mm]
  rect 0.7x1 smd: 1(-0.7,0) 2(0.7,0)
  silkscreen extent -1.27,-0.76 1.27,0.76
HDR1X2 [mm] "Connector; Header; 2 Position"
  rect 1.5x1.5 hole 0.9: 1(0,0)
  round 1.5 hole 0.9: 2(2.54,0)
  silkscreen extent -1.27,-1.27 3.81,1.27
"Resistor 1206" [mm]
  rect 1.25x2 smd: 1(-1.375,0) 2(1.375,0)
  silkscreen extent -2.54,-1.52 2.54,1.52
SODFL350X90-2N [mm] "SODFL, 2-Leads, Body 1.60x3.50mm, IPC Medium Density"
  rect 0.85x1.15 smd: 1(-1.6,0) 2(1.6,0)
  silkscreen extent -1.97,0.83 -1.88,0.92, body extent -1.35,-0.85 1.35,0.85, height 0.9
SODFL371X135-2N [mm] "SODFL, 2-Leads, Body 1.60x3.71mm, IPC Medium Density"
  rect 0.65x0.75 smd: 1(-1.85,0) 2(1.85,0)
  silkscreen extent -2.12,-0.9 1.4,0.9, body extent -1.42,-0.9 1.42,0.9, height 1.35
SOT89-150P410X160-3N [mm] "SOT89, 3-Leads, Body 4.50x2.45mm, Pitch 1.50mm, Lead Span 4.1mm, IPC Medium Density"
  rect 1.4x0.6 smd: 1(-1.8,1.5) 3(-1.8,-1.5)
  rect 1.8x0.6 smd: 2(-1.6,0)
  Top Layer region: -0.7,0.3 -0.05,0.95 1.85,0.95 2.5,0.3 2.5,-0.3 1.85,-0.95 -0.05,-0.95 -0.7,-0.3
  silkscreen extent -2.05,-2.3 1.32,2.47, body extent -1.28,-2.3 1.32,2.3, height 1.6

## Part data
C1: "Capacitor", LatestRevisionDate=17-Jul-2002, LatestRevisionNote="Re-released for DXP Platform.", PackageDescription="Radial Cap, Thru-Hole; 2 Leads; 0.3 in Pin Spacing", PackageReference=RAD-0.3, Published=8-Jun-2000, Publisher="Altium Limited"
D1: "DIODE SCHOTTKY 40V 1A PMDU", Average Rectified Current=1A, Case/Package=SOD-123-2, Forward Voltage=600mV, Manufacturer=Rohm, Max Forward Surge Current (Ifsm)=30A, Max Operating Temperature=150°C, Max Repetitive Reverse Voltage (Vrrm)=40V, Max Reverse Current=50nA, Min Operating Temperature=-55°C, Package Quantity=3000, Supplier Part Number 1=7526111, Category="Rectifier Diodes", ComponentLink1Description=https://datasheet.ciiva.com/29592/rb168m-40-29592360.pdf?src-supplier=Digi-Key, ComponentLink1URL=https://datasheet.ciiva.com/29592/rb168m-40-29592360.pdf?src-supplier=Digi-Key, ComponentLink2Description=https://datasheet.ciiva.com/14920/diodekousei-14920856.pdf?src-supplier=Digi-Key, ComponentLink2URL=https://datasheet.ciiva.com/14920/diodekousei-14920856.pdf?src-supplier=Digi-Key, ComponentLink3Description=https://datasheet.ciiva.com/29592/diodekousei-29592361.pdf?src-supplier=Digi-Key, ComponentLink3URL=https://datasheet.ciiva.com/29592/diodekousei-29592361.pdf?src-supplier=Digi-Key, Element Configuration=Single, Forward Current=1A, Height=0.8mm, Lead Free="Lead Free", Length=2.6mm, Manufacturer Part Number=RB168M-40TR, Max Reverse Voltage (DC)=40V, Mount="Surface Mount", Number of Pins=2, Packaging="Tape and Reel", Peak Non-Repetitive Surge Current=30A, Radiation Hardening=No, Reverse Voltage (DC)=40V, RoHS=Yes, Stock 1=1110, Supplier 1=RSComponents, Termination=SMD/SMT, Weight=0.000363oz, Width=1.6mm
D2: "ON SEMICONDUCTOR         MMSZ4678T1G.             ZENER DIODE, 500mW, 1.8V, SOD-123", Breakdown Voltage=1.89V, Case/Package=SOD-123-2, Forward Voltage=900mV, Manufacturer="ON Semiconductor", Max Operating Temperature=150°C, Max Power Dissipation=500mW, Max Reverse Current=50uA, Max Reverse Leakage Current=7.5uA, Min Operating Temperature=-55°C, Package Quantity=1, Supplier Part Number 1=MMSZ4678T1GOSCT-ND, Tolerance=5%, Voltage Rating (DC)=1.8V, Category="Zener Diodes", ComponentLink1Description=https://datasheet.ciiva.com/895/mmsz4678t1-d-895010.pdf?src-supplier=Digi-Key, ComponentLink1URL=https://datasheet.ciiva.com/895/mmsz4678t1-d-895010.pdf?src-supplier=Digi-Key, ComponentLink2Description=https://datasheet.ciiva.com/18435/70099545-18435515.pdf?src-supplier=Allied+Electronics, ComponentLink2URL=https://datasheet.ciiva.com/18435/70099545-18435515.pdf?src-supplier=Allied+Electronics, ComponentLink3Description=https://datasheet.ciiva.com/8346/mmsz4678t1-d-8346046.pdf?src-supplier=Avnet, ComponentLink3URL=https://datasheet.ciiva.com/8346/mmsz4678t1-d-8346046.pdf?src-supplier=Avnet, ComponentLink4Description=https://datasheet.ciiva.com/22697/1796559-22697910.pdf?src-supplier=Element14, ComponentLink4URL=https://datasheet.ciiva.com/22697/1796559-22697910.pdf?src-supplier=Element14, ComponentLink5Description=https://datasheet.ciiva.com/8026/mmsz4678t1-d-8026830.pdf?src-supplier=Element14, ComponentLink5URL=https://datasheet.ciiva.com/8026/mmsz4678t1-d-8026830.pdf?src-supplier=Element14, ComponentLink6Description=https://datasheet.ciiva.com/895/mmsz4678t1-d-895011.pdf?src-supplier=Digi-Key, ComponentLink6URL=https://datasheet.ciiva.com/895/mmsz4678t1-d-895011.pdf?src-supplier=Digi-Key, ComponentLink7Description=https://datasheet.ciiva.com/895/mmsz4678t1-d-895012.pdf?src-supplier=Digi-Key, ComponentLink7URL=https://datasheet.ciiva.com/895/mmsz4678t1-d-895012.pdf?src-supplier=Digi-Key, Contact Plating=Tin,Matte, Element Configuration=Single, ESD Protection=Yes, Height=0.053inch, Lead Free="Lead Free", Length=0.111inch, Manufacturer Part Number=MMSZ4678T1G, Material=Plastic, Max Breakdown Voltage=1.89V, Number of Pins=2, Packaging="Tape and Reel", Power Dissipation=500mW, Power Rating=500mW, Pricing 1="1=0.21000, 10=0.19300, 100=0.08090, 500=0.06350, 1000=0.04410 (USD)", Radiation Hardening=No, REACH SVHC="No SVHC", RoHS=Yes, Stock 1=39023, Supplier 1=Digi-Key, Termination=SMD/SMT, Test Current=50uA, Voltage Tolerance=5%, Width=0.071inch, Working Voltage=1.8V, Zener Current=50uA, Zener Voltage=1.8V
LED1 LED2 LED3 LED4 LED5 LED6 LED7 LED8 LED9 LED10 LED11 LED12 LED13 LED14 LED15 LED16 LED17 LED18 LED19 LED20 LED21 LED22 LED23 LED24 LED25 LED26 LED27 LED28 LED29 LED30 LED31 LED32 LED33 LED34 LED35 LED36 LED37 LED38 LED39 LED40 LED41 LED42 LED43 LED44 LED45 LED46 LED47 LED48 LED49 LED50: library part CMP-1426-00011-1, "SMD mono-color Chip LED, WL-SMCW, Red", Color=Red, Manufacturer="Wuerth Elektronik", PartNumber=150080RS75000, ComponentLink1Description="Manufacturer URL", ComponentLink1URL=http://www.we-online.com, ComponentLink2Description=Datasheet, ComponentLink2URL=http://katalog.we-online.com/led/datasheet/150080RS75000.pdf, PackageReference=0805_A
P1 P2: library part "Header 2", "Header, 2-Pin", LatestRevisionDate=17-Jul-2002, LatestRevisionNote="Re-released for DXP Platform.", Publisher="Altium Limited"
Q1: "NPN Bipolar Transistor, 2 A, 10 V, 3-Pin SC-62", Manufacturer=Toshiba, Supplier Part Number 1=7560281, Category=Uncategorized, Manufacturer Part Number=2SC5785(TE12L,F), RoHS=No, Stock 1=40, Supplier 1=RSComponents
R1: "Resistor", LatestRevisionDate=17-Jul-2002, LatestRevisionNote="Re-released for DXP Platform.", PackageDescription="Axial Device, Thru-Hole; 2 Leads; 0.3 in Pin Spacing", PackageReference=AXIAL-0.3, Published=8-Jun-2000, Publisher="Altium Limited"
R4: library part Res1, "Resistor", LatestRevisionDate=17-Jul-2002, LatestRevisionNote="Re-released for DXP Platform.", PackageDescription="Axial Device, Thru-Hole; 2 Leads; 0.3 in Pin Spacing", PackageReference=AXIAL-0.3, Published=8-Jun-2000, Publisher="Altium Limited"
U1: library part CMP-0885-00046-1, "Small, Low Power, 3-Axis +/-3 g Accelerometer with Analog Output, 1.6 KHz BW, Industrial, 16-pin QFN, Tray", Manufacturer="Analog Devices", Supply Current="350 uA", Voltage Supply (V)="1.8 to 3.6", # of Axes=3, -3dB Bandwidth="1.6 KHz", Code_JEDEC=MO-220-WGGD, ComponentLink1Description="Manufacturer URL", ComponentLink1URL=http://www.analog.com/en/index.html, ComponentLink2Description=Datasheet, ComponentLink2URL=http://www.analog.com/static/imported-files/data_sheets/ADXL335.pdf, ComponentLink3Description="Package Specification", ComponentLink3URL=http:/www.analog.com/static/imported-files/packages/PKG_PDF/LFCSP(CP)/CP-16/CP_16_14.pdf, ComponentLink4Description="Product URL", ComponentLink4URL=http://www.analog.com/en/mems-sensors/mems-inertial-sensors/adxl335/products/product.html, DatasheetVersion="Rev. B", Mounting Technology="Surface Mount", Output Type=Analog, PackageDescription="16-Pin Lead Frame Chip Scale Package, 4 x 4 mm Body, 0.65 mm Pitch", PackageReference=CP-16-14, PackageVersion="051909-A, 05/2009", Packing=Tray, PartNumber=ADXL335BCPZ, Sensitivity="300 mV/g"

## Via types
v1: diameter 1.27, hole 0.711, Top Layer to Bottom Layer, 51 vias
v2: diameter 0.5, hole 0.2, Top Layer to Bottom Layer, 4 vias

## Nets (pads, with @x,y where several pads share a name; then routed paths per layer and width w, separated by ;. In a path a pad name is that pad's centre, name@x,y a point inside that pad or via, vN(x,y) a via of type N, cw(c..) or ccw(c..) an arc to the next point about the centre after c; other vN are vias at no path point)
ACC_Out: D2.1 U1.12 | length 4.3
  Top Layer w0.254: U1.12 104.898,52.201 106.68,50.419 D2.1
GND: C1.1 D1.2 P2.1 Q1.3 U1.1 U1.2 U1.3 U1.4 U1.5 U1.6 U1.7 U1.9 U1.11 U1.13 U1.16 U1.17 | length 41.6
  Top Layer w0.254: U1.3 U1.17@101.741,50.901 ; U1.2 101.564,51.551 cw(c102.291,52.201) U1.17@101.316,52.201 ; U1.1 U1.17@101.316,52.201 ; U1.16 U1.17@101.316,52.201 ; U1.17@101.741,51.551 101.966,51.551 U1.17 ; U1.7 102.625,49.267 102.625,48.759 102.839,48.545 108.023,48.545 108.943,49.465 C1.1 111.368,49.465 D1.2 ; v2(102.841,50.676) 103.096,50.676 103.512,50.26 104.232,50.26 U1.9 ; U1.13 103.283,53.116 cw(c103.038,53.048) 103.286,52.995 103.264,52.892 ccw(c103.513,52.839) 103.259,52.857 cw(c102.372,52.921) 102.506,52.041 ccw(c102.545,51.79) 102.291,51.79 U1.17 ; U1.11 102.616,51.551 ccw(c102.616,51.226) U1.17 ; Q1.3 112.268,55.372 113.03,54.61 113.03,51.127 111.827,49.924 111.827,49.752 D1.2@111.54,49.465
  Top Layer w0.381: P2.1 100.181,50.292 100.222,50.251 U1.4 U1.17@101.316,50.251 ; U1.5 U1.17@101.316,50.251 ; v2(101.741,50.676) U1.17@101.316,50.251 ; U1.6 101.966,50.901 U1.17 102.616,50.901 U1.7
  other v2: 101.741,51.776 102.841,51.776
NetC1_2: C1.2 D1.1 D2.2 R4.1 | length 14.7
  Top Layer w0.254: R4.1 100.882,55.201 101.092,54.991 104.67,54.991 106.63,53.031 D2.2 106.73,53.031 108.673,51.088 108.87,51.088 C1.2 109.243,50.865 110.734,52.356 111.081,52.356 D1.1
NetLED1_1: LED1.1 LED2.1 LED3.1 LED4.1 LED5.1 LED6.1 LED7.1 LED8.1 LED9.1 LED10.1 LED11.1 LED12.1 LED13.1 LED14.1 LED15.1 LED16.1 LED17.1 LED18.1 LED19.1 LED20.1 LED21.1 LED22.1 LED23.1 LED24.1 LED25.1 LED26.1 LED27.1 LED28.1 LED29.1 LED30.1 LED31.1 LED32.1 LED33.1 LED34.1 LED35.1 LED36.1 LED37.1 LED38.1 LED39.1 LED40.1 LED41.1 LED42.1 LED43.1 LED44.1 LED45.1 LED46.1 LED47.1 LED48.1 LED49.1 LED50.1 Q1.2
NetLED1_2: LED1.2 LED2.2 LED3.2 LED4.2 LED5.2 LED6.2 LED7.2 LED8.2 LED9.2 LED10.2 LED11.2 LED12.2 LED13.2 LED14.2 LED15.2 LED16.2 LED17.2 LED18.2 LED19.2 LED20.2 LED21.2 LED22.2 LED23.2 LED24.2 LED25.2 LED26.2 LED27.2 LED28.2 LED29.2 LED30.2 LED31.2 LED32.2 LED33.2 LED34.2 LED35.2 LED36.2 LED37.2 LED38.2 LED39.2 LED40.2 LED41.2 LED42.2 LED43.2 LED44.2 LED45.2 LED46.2 LED47.2 LED48.2 LED49.2 LED50.2 R1.1
  other v1: 96.752,56.896 32.004,110.778 49.022,111.159 40.767,112.175 57.404,113.953 35.687,118.144 67.691,119.541 99.568,120.049 107.823,122.843 58.547,123.478 163.068,123.605 43.688,123.986 87.376,125.637 116.205,126.653 73.29,127.288 49.657,127.669 38.354,130.082 124.968,130.336 145.288,130.717 154.178,130.717 163.83,132.114 93.472,132.368 132.461,132.495 104.775,132.749 82.053,135.289 112.522,137.575 48.387,138.845 121.92,139.734 76.2,139.827 139.319,140.242 145.415,141.131 161.671,141.385 60.452,144.433 70.75,145.576 85.863,146.465 131.826,147.354 155.448,148.624 106.553,148.751 112.776,151.164 121.666,151.164 79.883,151.926 147.32,152.18 70.993,155.99 89.281,157.006 131.953,157.768 140.843,157.768 122.047,159.165 108.712,163.356 80.772,163.483 92.202,163.483 99.695,166.785
NetQ1_1: Q1.1 R4.2 | length 4.1
  Top Layer w0.254: R4.2 103.632,56.521 104.13,56.023 105.081,56.023 105.732,55.372 Q1.1
V_Batt: P1.1 P2.2 R1.2 | length 6.6
  Top Layer w0.381: R1.2 R1.2@94.107,56.791
  Top Layer w0.6: P2.2 P1.1 R1.2@94.107,56.791
VS: P1.2 U1.14 U1.15 | length 8.6
  Top Layer w0.381: P1.2 96.95,53.467 97.712,54.229 101.712,54.229 ; U1.15 101.966,53.975 101.712,54.229 ; 102.093,54.229 102.235,54.229 102.362,54.102 ; U1.14 102.616,53.848 102.362,54.102 ; 101.712,54.229 101.966,54.229 102.093,54.102 102.362,54.102
pads on no net: U1.8 U1.10

## Polygon pours and split planes (outlines as drawn)
NetLED1_2 on Bottom Layer "NONET_L-01_P-001" (solid, pour order 0): 1067 vertices, not listed, extent 28.311,44.323 172.133,171.689
NetLED1_1 on Top Layer "NONET_L-01_P-001" (solid, pour order 1): 1067 vertices, not listed, extent 28.311,44.323 172.133,171.689

## Silkscreen, mask and mechanical layers (free items; w line width, h text height)
Mechanical 1:
  drawing of 1787 lines, arcs and shapes, not listed